# Altium PCB radioslave_v3.PcbDoc
Units mil, origin at the board's own origin, x right, y up, seen from the top; angles counter-clockwise.
Board outline 1771.65 x 4330 mil, 2 copper layers (Top Layer, Bottom Layer); 62 components, 46 nets, 203 pads, 34 vias.
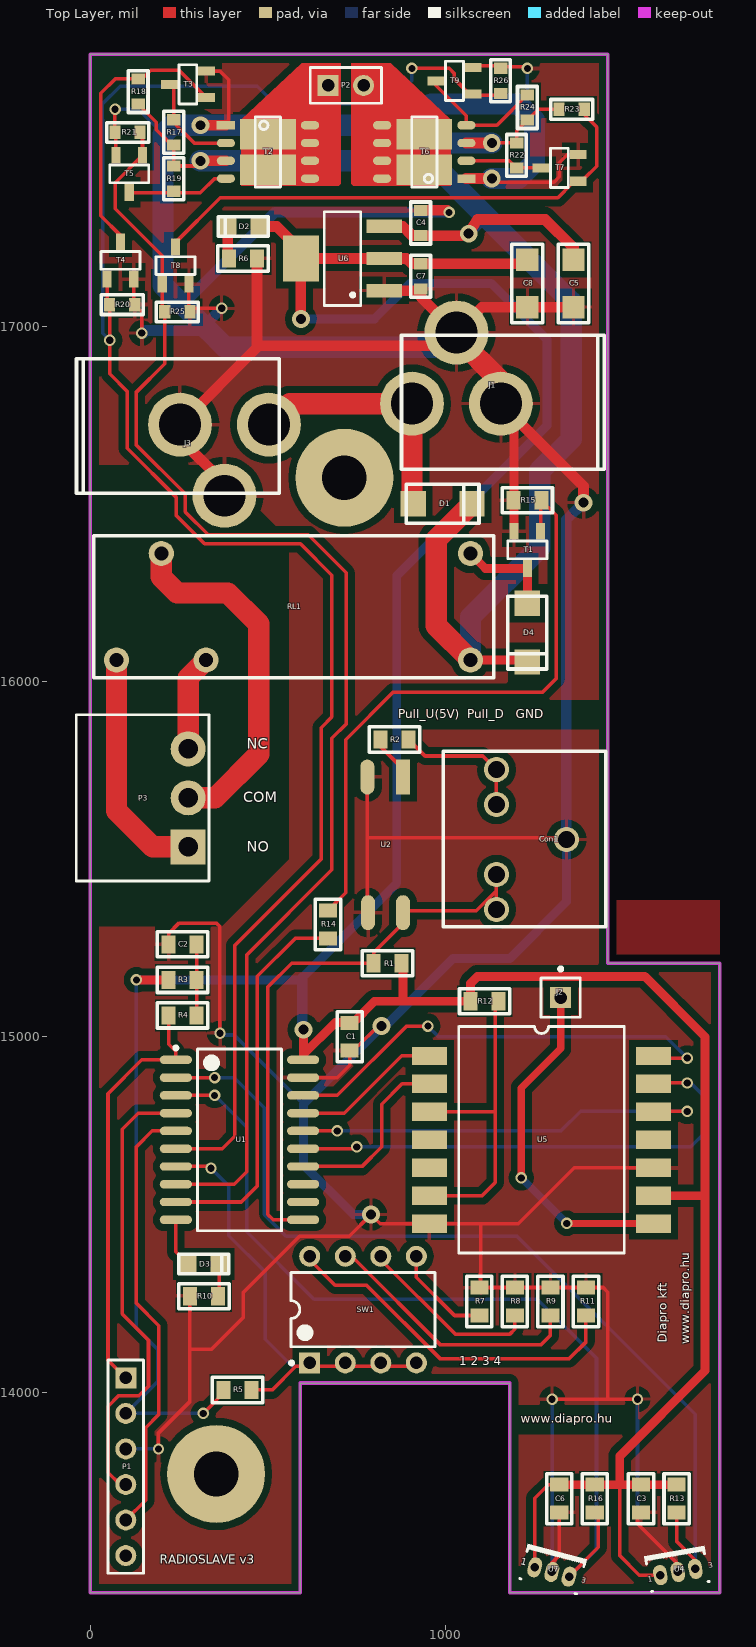
[diagram p0: Top Layer view]
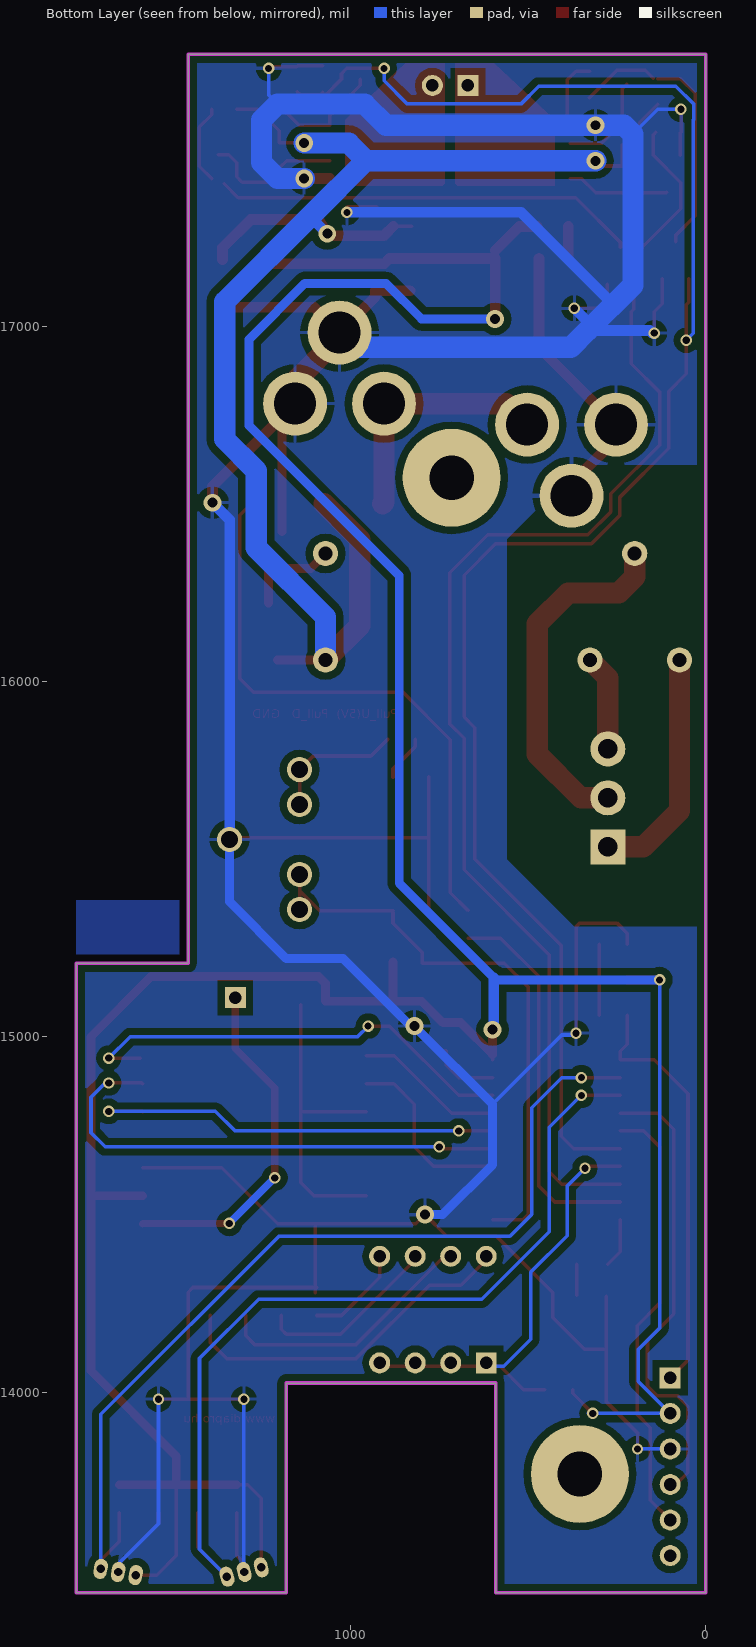
[diagram p1: Bottom Layer view, seen from below]
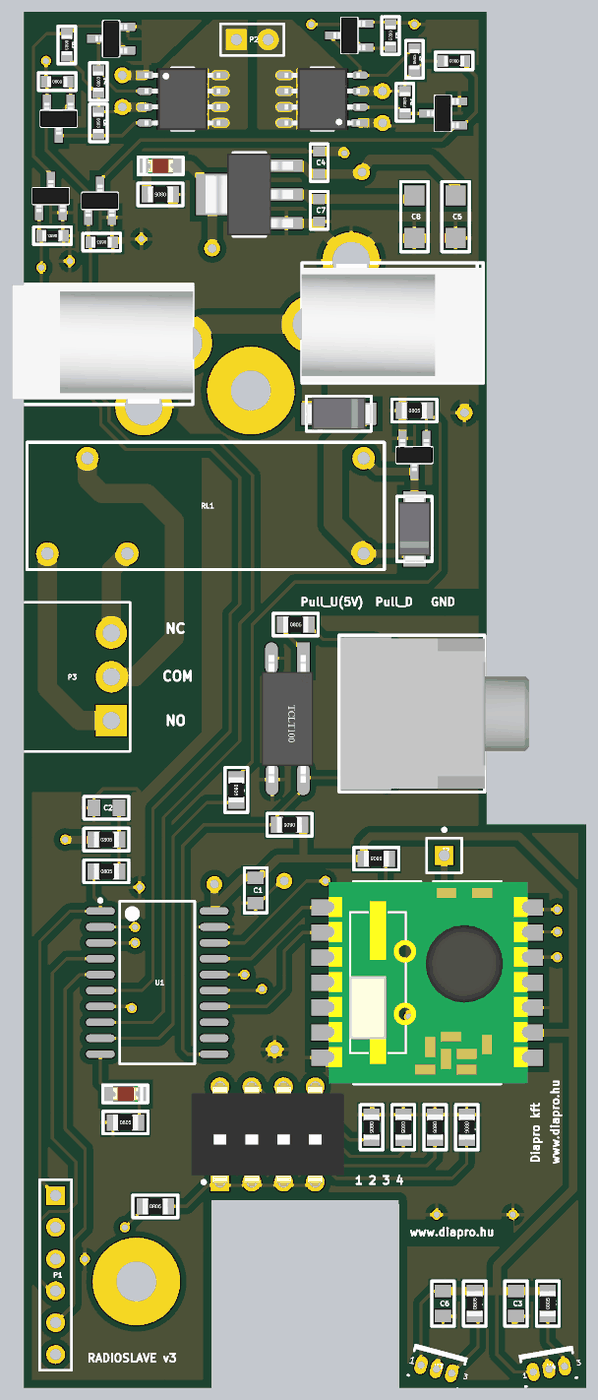
[diagram p2: 3D render of the assembled board from above, using the file's embedded part models]

## Layer stack, top to bottom
Top Layer: signal copper 1.4
Dielectric: dielectric 12.6, FR-4, Dk 4.8
Bottom Layer: signal copper 1.4

## Board outline
0,13435 0,17765 1456.69,17765 1456.69,15206.65 1771.65,15206.65 1771.65,13435 1181.1,13435 1181.1,14025.55 590.55,14025.55 590.55,13435

## Design rules (kind name [scope] priority, off if disabled: settings)
Clearance Clearance_to_polygon [All vs (InNamedPolygon('Bottom GND'))  or (InNamedPolygon('Top GND'))] p1: gap=20
Clearance [All] p2: gap=14
PolygonConnect [All] p1: connectstyle=Relief reliefconductorwidth=10 reliefentries=4 polygonreliefangle="90 Angle"
RoutingVias [All] p1: holewidth=20 width=32 viastyle="Through Hole" minholewidth=20 minwidth=32 maxholewidth=28 maxwidth=50
SilkToSilkClearance [All] p1: silktosilkclearance=0
SilkscreenOverComponentPads [All] p1: minsilkscreentomaskgap=0
SolderMaskExpansion [All] p1: expansion=4
Width [All] p1: maxlimit=60 minlimit=10 preferedwidth=10
26 further rules are at their usual default settings.

## Components (designator, comment, footprint, x,y, rotation, side; value= is the part's Value field where it differs from the comment)
C1 "100nF" FP_0805_CAP_060 730,15000 r90 top
C2 "100nF" FP_0805_CAP_060 260,15260 r0 top
C3 "100nF" FP_0805_CAP_060 1550,13700 r90 top
C4 "100nF" FP_0603_CAP_080 930,17290 r270 top
C5 "10uF" FP_1206_CAP_085 1360,17120 r270 top
C6 "100nF" FP_0805_CAP_060 1320,13700 r90 top
C7 "100nF" FP_0603_CAP_080 930,17140 r270 top
C8 "10uF" FP_1206_CAP_085 1230,17120 r90 top
Con1 "Stereo_Jack" STEREO_JACK 1340,15555 r180 top
D1 "DIODE_big" "FP_SMA DO214AC" 909,16500 r0 top
D2 "LED_RED" FP_0805_LED_RED 470,17280 r180 top
D3 "LED_GREEN" FP_0805_LED_RED 280,14360 r0 top
D4 "DIODE_big" "FP_SMA DO214AC" 1230,16220 r270 top
J1 "2.xmm" FP_DC_TAP_ANYA 905.51,16781.46 r270 top
J2 "ANT" PIN1 1324,15110 r0 top
J3 "2.xmm" FP_DC_TAP_ANYA 502.65,16722.44 r90 top
P1 "Header 6" HDR1X6 100,14040 r270 top
P2 "Header 2" HDR1X2 669.29,17677.17 r0 top
P3 "Header 3" "SORKAPOCS 3 P RM3.81" 275.47,15810 r270 top
R1 "10k" FP_0805_RES 836.61,15206.65 r180 top
R2 "470R" FP_0805_RES 856.3,15836.57 r0 top
R3 "10K" FP_0805_RES 260,15160 r0 top
R4 "100R" FP_0805_RES 260,15060 r0 top
R5 "10k" FP_0805_RES 414,14006 r0 top
R6 "270R" FP_0805_RES 430,17190 r180 top
R7 "10k" FP_0805_RES 1095,14255 r270 top
R8 "10k" FP_0805_RES 1195,14255 r270 top
R9 "10k" FP_0805_RES 1295,14255 r270 top
R10 "270R" FP_0805_RES 320,14270 r0 top
R11 "10k" FP_0805_RES 1395,14255 r270 top
R12 "10k" FP_0805_RES 1110,15100 r180 top
R13 "820R" FP_0805_RES 1650,13700 r90 top
R14 "470R" FP_0805_RES 669,15316 r270 top
R15 "10k" FP_0805_RES 1230,16510 r0 top
R16 "820R" FP_0805_RES 1420,13700 r90 top
R17 "1k" FP_0603_RES 235,17545 r90 top
R18 "10K" FP_0603_RES 135,17660 r270 top
R19 "10K" FP_0603_RES 235,17415 r270 top
R20 "10K" FP_0603_RES 90,17060 r180 top
R21 "10K" FP_0603_RES 105,17545 r0 top
R22 "1k" FP_0603_RES 1200,17480 r270 top
R23 "10K" FP_0603_RES 1355,17610 r180 top
R24 "10K" FP_0603_RES 1230,17615 r90 top
R25 "10K" FP_0603_RES 245,17040 r180 top
R26 "10K" FP_0603_RES 1155,17690 r270 top
RL1 "S7001E12W" RELAY_MORSE 1070,16360 r180 top
SW1 "DIPSW4" "DIP switch 4 TH" 767.72,14232.24 r90 top
T1 "Si2306" FET_SOT23 1230,16370 r90 top
T2 "SI4532ADY" FET_SOIC8_copper_pad 500,17490 r0 top
T3 "PMBF170" FET_SOT23 275,17680 r0 top
T4 "PMBF170" FET_SOT23 85,17185 r270 top
T5 "PMBF170" FET_SOT23 109.76,17428.36 r90 top
T6 "SI4532ADY" FET_SOIC8_copper_pad 940,17490 r180 top
T7 "PMBF170" FET_SOT23 1320,17445 r0 top
T8 "PMBF170" FET_SOT23 240,17170 r270 top
T9 "PMBF170" FET_SOT23 1025,17690 r0 top
U1 "PIC24F16KA101-I/SO" SOIC-SO20_N 420,14710 r0 top
U2 "KB817D-B" SOP-4L 830,15540 r270 top
U4 "A3122EUA" "Allegro_hall sensor" 1653.54,13493.74 r10 top
U5 "RFM12B" RFM12B-S1 1270,14710 r0 top
U6 "LD1117xx" SUPPLY_SOT223 710,17190 r180 top
U7 "A3122EUA" "Allegro_hall sensor" 1299.21,13493.74 r345 top

## Footprints (in the part's own frame and the unit in brackets; to place one, negate y for a bottom-side part, rotate by r counter-clockwise, add the part's x,y. Pads: shape width x height; smd on the part's side, far side on the other; paste and mask are expansions set on the pad)
"Allegro_hall sensor" [mm] "SIP; 3 Leads; Body 3 x 4 x 1.5 mm (typ); Pitch 1.27 mm"
  oval 0.95x1.45 hole 0.6: 1(-1.27,0) 2(0,0) 3(1.27,0)
  silkscreen extent -2.2,-1.05 2.2,1.53
"DIP switch 4 TH" [mm]
  rect 1.5x1.5 hole 0.9: 1(-3.81,3.81)
  round 1.5 hole 0.9: 2(-3.81,1.27) 3(-3.81,-1.27) 4(-3.81,-3.81) 5(3.81,-3.81) 6(3.81,-1.27) 7(3.81,1.27) 8(3.81,3.81)
  silkscreen extent -3.93,-5.15 2.65,5.23, body extent -4.1,-6.1 4.1,6.1, height 5
FET_SOIC8_copper_pad [mm]
  rect 4x2.2 smd: 0(0,-1.27) 0(0,1.27)
  rect 1.3x0.6 smd: 1(-3.008,1.905)
  oval 1.3x0.6 smd: 2(-3.008,0.635) 3(-3.008,-0.635) 4(-3.008,-1.905) 5(3.008,-1.905) 6(3.008,-0.635) 7(3.008,0.635) 8(3.008,1.905)
  silkscreen extent -0.9,-2.5 0.9,2.5, body extent -3.03,-2.5 3.03,2.5, height 1.9
FET_SOT23 [mm] "SOT23-3 tok"
  rect 1.2x0.65 smd: D(-1.327,0) G(1.327,-0.95) S(1.327,0.95)
  silkscreen extent -0.64,-1.4 0.64,1.4, body extent -1.27,-1.46 1.27,1.46, height 0.97
FP_0603_CAP_080 [mm] "0.8mm magas 0603 kapacitás"
  rect 0.8x0.95 smd: 1(-0.9,0) 2(0.9,0)
  silkscreen extent -1.5,-0.7 1.5,0.7, body extent -0.8,-0.4 0.76,0.4, height 0.8
FP_0603_RES [mm] "0603 ellenállás"
  rect 0.8x0.95 smd: 1(-0.9,0) 2(0.9,0)
  silkscreen extent -1.5,-0.7 1.5,0.7, body extent -0.8,-0.4 0.8,0.4, height 0.44
FP_0805_CAP_060 [mm] "0805 kapacitás YAGEO 0.6 mm magas"
  rect 1x1.3 smd: 1(-1,0) 2(1,0)
  silkscreen extent -1.8,-0.9 1.8,0.9, body extent -1,-0.64 1.03,0.64, height 0.6
FP_0805_LED_RED [mm] "0805 méretû piros LED"
  rect 1.2x1.3 smd: A(-0.1,0) K(2.1,0)
  silkscreen extent -0.8,-0.7 2.8,0.7, body extent 0.01,-0.63 2.03,0.62, height 1.1
FP_0805_RES [mm] "0805 ellenállás"
  rect 1x1.3 smd: 1(-1,0) 2(1,0)
  silkscreen extent -1.8,-0.9 1.8,0.9, body extent -1,-0.62 1,0.63, height 0.62
FP_1206_CAP_085 [mm] "1206 kapacitás 0.85 mm"
  rect 1.6x1.6 smd: 1(-1.7,0) 2(1.7,0)
  silkscreen extent -2.8,-1.1 2.8,1.1, body extent -1.52,-0.79 1.58,0.79, height 0.85
FP_DC_TAP_ANYA [mil] "DC HEBA25 TÁPFESZÜLTSÉG ALJZAT ZÁRT, NYÁKBA 90°"
  round 180 hole 118: 1(0,0) 2(0,250) 3(-200,125)
  silkscreen extent -193,-30 185,541, body extent -190,-31 183,539, height 440
"FP_SMA DO214AC" [mm] "SMA DO-214AC tok"
  rect 1.8x1.8 smd: A(0,0) K(4.2,0)
  silkscreen extent -0.5,-1.4 4.7,1.4, body extent -0.5,-1.3 4.7,1.3, height 2.42
HDR1X2 [mm] "Connector; Header; 2 Position"
  rect 1.5x1.5 hole 0.9: 1(0,0)
  round 1.5 hole 0.9: 2(2.54,0)
  silkscreen extent -1.27,-1.27 3.81,1.27
HDR1X6 [mm] "Connector; Header; 6 Position"
  rect 1.5x1.5 hole 0.9: 1(0,0)
  round 1.5 hole 0.9: 2(2.54,0) 3(5.08,0) 4(7.62,0) 5(10.16,0) 6(12.7,0)
  silkscreen extent -1.27,-1.27 13.97,1.27
PIN1 [mm] "Connector; Plug"
  rect 1.5x1.5 hole 0.9: 1(0,0)
  silkscreen extent -1.4,-1.4 1.4,2.17
RELAY_MORSE [mm]
  round 1.8 hole 1: 1(0,7.62) 2(0,0) 3(18.9,7.62) 4(22.1,0) 5(25.3,7.62)
  silkscreen extent -1.65,-1.27 26.92,8.89, body extent -1.65,-1.27 26.92,8.89, height 12.5
RFM12B-S1 [mm]
  rect 2.5x1.3 smd: 1(-8,6) 2(-8,4) 3(-8,2) 4(-8,0) 5(-8,-2) 6(-8,-4) 7(-8,-6) 8(8,-6) 9(8,-4) 10(8,-2) 11(8,0) 12(8,2) 13(8,4) 14(8,6)
  silkscreen extent -5.91,-8.1 5.92,8.1, body extent -7.88,-8.05 8.04,8.05, height 2.1
SOIC-SO20_N [mm] "SOIC, 20-Leads, Body 12.8x7.5mm, Pitch 1.27mm, IPC Medium Density"
  oval 2.3x0.6 smd: 1(-4.55,5.715) 2(-4.55,4.445) 3(-4.55,3.175) 4(-4.55,1.905) 5(-4.55,0.635) 6(-4.55,-0.635) 7(-4.55,-1.905) 8(-4.55,-3.175) 9(-4.55,-4.445) 10(-4.55,-5.715) 11(4.55,-5.715) 12(4.55,-4.445) 13(4.55,-3.175) 14(4.55,-1.905) 15(4.55,-0.635) 16(4.55,0.635) 17(4.55,1.905) 18(4.55,3.175) 19(4.55,4.445) 20(4.55,5.715)
  silkscreen extent -4.67,-6.5 3,6.69, body extent -3.75,-6.5 3.75,6.5, height 2.65
SOP-4L [mm]
  rect 2.5x1 smd: 1(-4.85,1.275)
  oval 2.5x1 smd: 2(-4.85,-1.275) 3(4.85,-1.225) 4(4.85,1.275)
  body extent -5.1,-2.05 5.1,2.05, height 2.1
"SORKAPOCS 3 P RM3.81" [mm] "SORKAPOCS 3 P RM3.81 CSAPSORLÉC TLPHC100V-03P (TLM) ZÁRT 8A 150V VDE [43-22-68]"
  rect 2.5x2.5 hole 1.4: 1(7,0)
  round 2.5 hole 1.4 mask+0.102: 2(3.5,0) 3(0,0)
  silkscreen extent -2.44,-8 9.45,1.5, body extent -2.41,-8 9.45,1.5, height 7.2
STEREO_JACK [mm] "JACK 3.5mm ANYA 90° JS35-09 (T-T) LEVÁL. NYÁK SZTEREO 90° A-V [43-08-39]"
  round 1.8 hole 1.2: 1(0,0) 2(5,5) 2(5,2.5) 3(5,-2.5) 3(5,-5)
  silkscreen extent -2.82,-6.3 8.81,6.22, body extent -6.33,-6.13 8.67,6.07, height 11.5
SUPPLY_SOT223 [mm] "SOT223 package, 3 leads"
  rect 2.55x0.95 smd: 1(-2.975,2.3) 2(-2.975,0) 3(-2.975,-2.3)
  rect 2.55x3.3 smd: 2(2.975,0)
  silkscreen extent -1.3,-3.35 1.3,3.35, body extent -3.5,-3.25 3.5,3.25, height 1.65

## Part data
C1 C2 C3 C4 C5 C6 C7 C8: library part Cap, "Capacitor"
D2: library part LED_R, "Typical LED"
D3: library part LED_G, "Typical LED"
J1 J3: library part DC_TAP_ANYA, "2.xmm DC HEBA25 TÁPFESZÜLTSÉG ALJZAT ZÁRT, NYÁKBA 90°"
J2: library part Socket, "Socket"
P1: "Header, 6-Pin"
P2: "Header, 2-Pin"
P3: "Header, 3-Pin"
R1 R2 R3 R4 R5 R6 R7 R8 R9 R10 R11 R12 R13 R14 R15 R16 R17 R22: library part Res3, "Resistor"
R18 R19 R20 R21 R23 R24 R25 R26: library part RES, "Resistor"
RL1: library part RELAY_MORSE, "S7001E12W  12V morse 230AC/10A"
T1 T3 T4 T5 T7 T8 T9: library part NMOS
T2 T6: library part "SI4532ADY   3.7A   30V"
U1: "16-Bit Flash Microcontroller with nanoWatt XLP Technology, 16KB Flash, 1.5KB SRAM, 20-Pin SOIC, Industrial Temperature"
U2: "KB817D-B (KIN) SOP-4L OPTOCOUPLER TRANS-OUT 300-600% 5kV SOP-4L [84-00-48]"
U4 U7: "Hall-Effect Switch for High-Temperature Operation"
U5: "FM Module"
U6: "LD1117xx 3,3V lin reg"

## Free pads (board coordinates)
  round 275.59 hole 125.98: 0(354.33,13769.65) 0(715,16573)

## Via types
v1: diameter 32, hole 20, Top Layer to Bottom Layer, 24 vias
v2: diameter 50, hole 28, Top Layer to Bottom Layer, 10 vias

## Nets (pads, with @x,y where several pads share a name; then routed paths per layer and width w, separated by ;. In a path a pad name is that pad's centre, name@x,y a point inside that pad or via, vN(x,y) a via of type N, cw(c..) or ccw(c..) an arc to the next point about the centre after c; other vN are vias at no path point)
AN0: R13.1 U1.2 U4.3 | length 2645.1
  Top Layer w10: U1.2 v1(350,14885) ; R13.1 1650,13580 1702.78,13527.22 U4.3
  Bottom Layer w10: v1(350,14885) 405,14885 490,14800 490,14500 551.06,14438.94 1201.06,14438.94 1702.78,13937.22 U4.3
AN1: R16.1 U1.3 U7.3 | length 2522.5
  Top Layer w10: U1.3 v1(350,14835) ; U7.3 1430,13563.29 R16.1@1430,13660.63
  Bottom Layer w10: v1(350,14835) 440,14745 440,14451.69 629.92,14261.77 1258.23,14261.77 1424.64,14095.36 1424.64,13557.94 U7.3
AN2: R5.2 SW1.1 SW1.2 SW1.3 SW1.4 U1.7 | length 1304.4
  Top Layer w10: U1.7 335,14635 v1(340,14630) ; R5.2 511.94,14006 578.35,14072.4 SW1.4@927.56,14072.4
  Bottom Layer w10: v1(340,14630) 390,14580 390,14440 492.13,14337.87 492.13,14148.78 568.5,14072.4 SW1.1@617.72,14072.4
AN2/PGD1: P1.4 U1.4 | length 1310.7
  Top Layer w10: P1.4 84,13740 50.47,13773.53 50.47,13960.51 79.49,13989.53 136.87,13989.53 164,14016.66 164,14146 90,14220 90,14740 135,14785 U1.4
GND: C1.1 C2.1 C3.1 C4.1 C5.2 C6.1 C7.2 C8.1 Con1.1 J1.2 J1.3 J3.2 J3.3 P1.3 R6.1 R7.1 R8.1 R9.1 R10.1 R11.1 R15.1 R20.1 R21.1 R25.1 R26.1 T1.S T2.1 T3.S T4.S T5.S T6.1 T7.S T8.S T9.S U1.19 U2.2 U2.3 U4.2 U5.7 U5.10 U6.1 U7.2 | length 17713.1
  Top Layer w10: v1(70,17610) 65,17605 65,17600 69.57,17595.43 R21.1 72.35,17542.21 T5.S ; T4.S 122.4,17063.03 R20.1 145,17040.43 v1(145,16980) ; v1(192,13840) 192,13885 280.63,13973.63 R10.1 ; C2.1 220.63,15290.63 250,15320 355,15320 365,15310 v1(365,15010) ; T8.S 277.4,17043.03 R25.1 290.43,17050 v1(370,17050) ; 284.61,14120 340.51,14120 430,14209.49 430,14280 588.94,14438.94 728.94,14438.94 v2(790,14500) 816.22,14473.78 U5.7 1204.78,14473.78 1362.26,14631.26 U5.10 ; T3.S 365,17717.4 389.67,17692.73 389.67,17580 381.57,17571.91 T2.1 ; U1.19 695,14885 730,14920 C1.1 740.63,14960.63 820,15040 v2@820,15050 ; U2.3@779.8,15349.06 779.8,15560.2 ; U2.2 779.8,15560.2 ; J1.3@994.06,16945 J1.3 J1.3@1030.51,16969.49 ; v1@1004.57,17325.43 v1(1010,17320) ; T9.S@1077.24,17732.4 1148.03,17732.4 1150.43,17730 1225,17730 v1(1230,17725) ; R7.1 R7.1@1099.37,14294.37 ; R7.1@1099.37,14280 R7.1@1099.37,14294.37 ; 1099.37,14473.15 R7.1@1099.37,14294.37 ; v2(1130,17415) 1140,17405 1305,17405 1320,17420 1320,17460 1342.4,17482.4 T7.S ; J1.2 J1.2@1161.98,16774.98 ; U7.2 1299.21,13519.21 1320,13540 C6.1 ; v1(1300,13980) 1456.69,13980 ; Con1.1 1334.8,15560.2 779.8,15560.2 ; C3.1@1540,13660.63 1540,13630 1653.54,13516.46 U4.2 ; v1(1540,13980) 1456.69,13980 ; R7.1@1099.37,14294.37 R8.1 R9.1 R11.1 1443.78,14294.37 1456.69,14281.46 1456.69,13980
  Top Layer w25: T1.S J1.2@1192.6,16744.37
  Top Layer w30: v2(310,17565) T2.1 ; J3.3 377.65,16557.35 252.65,16682.35 J3.2 470.11,16939.89 469.37,16940.63 ; R6.1 469.37,16945 J1.3@994.06,16945 ; U6.1@832.24,17099.57 930,17099.57 930,17081.97 J1.3 1102.13,17053.07 C5.2 ; C4.1 v1@1004.57,17325.43 ; T6.1 v2(1130,17415) ; J1.2@1161.98,16774.98 1192.6,16744.37 1388,16548.97 v2(1388,16503)
  Top Layer w60: J1.3@1030.51,16969.49 1155.51,16844.49 J1.2
  Bottom Layer w10: v1(70,17610) 135,17610 205,17540 ; P1.3 v1(192,13840) ; v1(365,15010) 365,15005 405,15005 600,14810 ; v2@810,15020 v2@820,15020 ; J1.2@1155.51,16705.51 J1.2 ; 1205,17625 1230,17650 v1(1230,17725) ; U7.2 1299.21,13519.21 1300,13520 v1(1300,13980) ; v1(1540,13980) 1540,13630 1653.54,13516.46 U4.2
  Bottom Layer w25: v2(790,14500) 740,14500 600,14640 600,14810 v2@810,15020 ; v2@820,15020 1020,15220 1180,15220 1340,15380 Con1.1
  Bottom Layer w30: v1(145,16980) 150,16980 157.5,16987.5 332.5,16987.5 332.5,17012.5 v1(370,17050) ; 275,17075 520,17320 v1(1010,17320) ; J1.3@989.06,16940 J1.3 ; Con1.1 1340,16455 v2(1388,16503)
  Bottom Layer w60: J1.3@989.06,16940 380,16940 332.5,16987.5 205,17115 205,17540 230,17565 v2(310,17565) 900,17565 960,17625 1205,17625 1250,17580 1250,17460 1205,17415 v2(1130,17415)
  other v2: 820,15030
GPIO0: Con1.2 R1.2 U1.11 U2.4 | length 1628.1
  Top Layer w10: U1.11 515,14485 500,14500 500,15140 566.65,15206.65 R1.2 797.24,15236.18 880.2,15319.13 U2.4 ; U2.4@880.2,15354.29 1086.29,15354.29 1143.15,15411.15 Con1.2@1143.15,15456.57 ; Con1.2@1143.15,15358.15 1143.15,15407.36
GPIO1: R14.2 U1.9 | length 1080.9
  Top Layer w10: U1.9 425,14535 470,14580 470,15170 576.63,15276.63 R14.2
GPIO2: D3.A U1.10 | length 139.6
  Top Layer w10: U1.10 240.87,14395.2 D3.A
GPIO3: R20.2 R26.2 T4.G T9.G U1.6 | length 5065.2
  Top Layer w10: T4.G 47.6,17066.97 R20.2 54.57,16865.43 104,16816 104,16656 242.65,16517.35 242.65,16466.52 321.73,16387.44 591.56,16387.44 680,16299 680,15900 650,15870 650,15500 406.86,15256.86 406.86,14720 371.86,14685 U1.6 ; v1(905,17725) 1009.84,17725 1025,17709.84 1025,17695 1067.4,17652.6 T9.G ; T9.G@1077.24,17657.6 1084.84,17650 1140.43,17650 R26.2@1150,17659.57
  Bottom Layer w10: v1(55,16960) 35,16980 35,17580 34,17581 34,17624.91 84.09,17675 470,17675 520,17625 840,17625 905,17690 v1(905,17725)
GPIO4/PGC1: P1.5 U1.5 | length 1244.1
  Top Layer w10: P1.5 156,13696 156,13900 193,13937 193,14187 130,14250 130,14690 175,14735 U1.5
GPIO5: R21.2 R25.2 T5.G T8.G U1.8 | length 3790.2
  Top Layer w10: R21.2 147.16,17538.28 T5.G 70,17403.44 70,17330 202.6,17197.4 T8.G 202.6,17046.97 R25.2 209.57,16893.57 129,16813 129,16666.36 267.65,16527.7 267.65,16476.88 332.09,16412.44 613.56,16412.44 720,16306 720,15880 680,15840 680,15470 440,15230 440,14620 405,14585 U1.8
IN: D1.A J1.1 J3.1 | length 710.2
  Top Layer w60: J3.1 561.67,16781.46 J1.1 905.51,16503.49 D1.A
M1: P2.1 T2.0 T2.5 T2.6 T2.7 T2.8 | length 283.2
  Top Layer w30: T2.5 T2.6 T2.7 T2.8 669.29,17615.87 P2.1
M2: P2.2 T6.0 T6.5 T6.6 T6.7 T6.8 | length 283.8
  Top Layer w30: P2.2 821.57,17624.88 T6.5 T6.6 T6.7 T6.8
M\C\L\R\: P1.1 R4.1 U1.1 | length 1184.3
  Top Layer w10: P1.1 50,14090 50,14840 145,14935 U1.1 240.87,14959.13 220.63,14979.37 R4.1
MISO: U1.17 U5.1 | length 422.7
  Top Layer w10: U1.17 715,14785 876.22,14946.22 U5.1
MOSI: U1.16 U5.12 | length 1199.2
  Top Layer w10: U1.16 v1(695,14735) ; U5.12 1586.22,14790 v1(1680,14790)
  Bottom Layer w10: v1(695,14735) 1325,14735 1380,14790 v1(1680,14790)
NetC2_2: C2.2 R3.2 R4.2 | length 200
  Top Layer w10: R4.2 R3.2 C2.2
NetCon1_3: Con1.3 R2.2 | length 381
  Top Layer w10: R2.2 942.24,15790 1105,15790 1143.15,15751.85 Con1.3@1143.15,15653.43
NetD2_K: D2.K R6.2 | length 86.7
  Top Layer w30: R6.2@387.32,17193.31 D2.K
NetD3_K: D3.K R10.2 | length 86.7
  Top Layer w10: R10.2@362.68,14273.31 D3.K
NetD4_A: D4.A RL1.2 T1.D | length 275.3
  Top Layer w25: RL1.2 1112.24,16317.76 T1.D D4.A
NetJ2_1: J2.1 U5.8 | length 978.5
  Top Layer w20: v1(1213,14603) 1213,14856 1324,14967 J2.1 ; v1(1341,14475) 1583.74,14475 U5.8
  Bottom Layer w20: v1(1213,14603) v1(1341,14475)
NetP3_1: P3.1 RL1.5 | length 670.5
  Top Layer w60: RL1.5@73.94,16062.95 73.94,15636.06 175.59,15534.41 P3.1
NetP3_2: P3.2 RL1.4 | length 1011.1
  Top Layer w60: RL1.4 199.92,16294.08 245,16249 387,16249 474,16162 474,15795 351.2,15672.2 P3.2
NetP3_3: P3.3 RL1.3 | length 270.9
  Top Layer w60: P3.3 275.47,16009.57 RL1.3
NetR2_1: R2.1 U2.1 | length 131.8
  Top Layer w10: R2.1 816.93,15816.89 880.2,15753.62 U2.1
NetR7_2: R7.2 SW1.5 | length 271
  Top Layer w10: SW1.5@917.72,14372.4 917.72,14323.19 1025.28,14215.63 R7.2
NetR8_2: R8.2 SW1.6 | length 508
  Top Layer w10: SW1.6@817.72,14372.4 1026.77,14163.35 1181.1,14163.35 1195,14177.24 R8.2
NetR9_2: R9.2 SW1.7 | length 743.1
  Top Layer w10: SW1.7@717.72,14372.4 745.67,14372.4 984.25,14133.82 1269.69,14133.82 1295,14159.13 R9.2
NetR11_2: R11.2 SW1.8 | length 986.3
  Top Layer w10: SW1.8@617.72,14372.4 688.98,14301.14 777.56,14301.14 984.25,14094.45 1348.43,14094.45 1395,14141.02 R11.2
NetR12_1: R12.1 U5.3 U5.6 | length 886.1
  Top Layer w10: U5.6 1102.52,14552.52 1140,14590 R12.1@1140,15090.63 ; U5.3 1140,14788.74
NetR14_1: R14.1 R15.2 T1.G | length 1769
  Top Layer w10: R14.1 719,15405.37 719,15836 853,15970 1273,15970 1311,16008 1311,16467.74 R15.2@1269.37,16509.37 ; T1.G R15.2@1267.4,16508.03
NetR17_2: R17.2 T2.2 T3.D | length 283.1
  Top Layer w10: T3.D 235,17667.76 R17.2 235,17572.3 292.3,17515 T2.2
NetR18_1: R18.1 T3.G T4.D | length 783.2
  Top Layer w10: T4.D 85,17255 30,17310 30,17655 70.43,17695.43 R18.1 ; R18.1@147.72,17697.72 170,17720 250,17720 250,17719.84 T3.G
NetR19_2: R19.2 T2.4 T5.D | length 288.8
  Top Layer w10: T5.D 110.87,17375 310,17375 350,17415 T2.4
NetR22_2: R22.2 T6.2 T7.D | length 218
  Top Layer w10: T6.2 1179.57,17465 R22.2 1200.43,17445 T7.D
NetR23_1: R23.1 T7.G T8.D | length 1419.9
  Top Layer w10: T8.D 240,17235 366.18,17361.18 1316.18,17361.18 T7.G@1355,17400 ; T7.G@1390,17415 1425,17450 1425,17560 1390.43,17594.57 R23.1
NetR24_2: R24.2 T6.4 T9.D | length 372.4
  Top Layer w10: T9.D@972.76,17695 T9.D 972.76,17677.24 1058.43,17591.57 T6.4 1144.57,17565 R24.2
"RF I\R\Q\": U1.14 U5.2 | length 522.5
  Top Layer w10: U1.14 765,14635 820,14690 820,14810 877.48,14867.48 U5.2
"RF S\S\": U1.18 U5.14 | length 1287.7
  Top Layer w10: U1.18 695,14835 890,15030 v1(950,15030) ; U5.14@1591.18,14940 v1(1680,14940)
  Bottom Layer w10: v1(950,15030) 980,15000 1620,15000 v1(1680,14940)
SCK: U1.15 U5.13 | length 1422.2
  Top Layer w10: U1.15 755,14685 v1(750,14690) ; U5.13 1587.48,14870 v1@1690,14870
  Bottom Layer w10: v1(750,14690) 1690,14690 1730,14730 1730,14830 v1@1690,14870
  other v1: 1680,14870
SCL: U1.12
SDA: U1.13
VCC3.3V: C1.2 C3.2 C6.2 C7.1 C8.2 D2.A P1.2 R1.1 R3.1 R5.1 R12.2 R13.2 R16.2 U1.20 U4.1 U5.9 U6.2 U7.1 | length 10145.1
  Top Layer w10: v1(318,13940) 374.63,13996.63 R5.1 ; U6.2@592.87,17190 U6.2@592.87,17212.13 ; U1.20 600,14935.87 600,14950 ; C8.2@1218.5,17175.43 C8.2 ; U7.1 1250.92,13700.92 1289.37,13739.37 C6.2 ; 1490,13739.37 1490,13540 1544.94,13485.06 U4.1 U4.1@1610,13479.36
  Top Layer w25: v1(130,15160) R3.1 ; v2(600,15020) 600,14950 690,15040 740,15040 800,15100 880,15100 ; R1.1@880,15210.63 880,15100 ; C6.2 R16.2 1490,13739.37 ; U5.9 1727.48,14552.52 ; R13.2 C3.2 1490,13739.37 ; 880,15100 R12.2 1070.63,15150.63 1090,15170 1560,15170 1730,15000 1730,14060 1490,13820 1490,13739.37
  Top Layer w30: D2.A 525,17280 U6.2@592.87,17212.13 ; v2(592.87,17020) 592.87,17190 827.13,17190 890,17190 904.57,17175.43 C7.1 C8.2@1218.5,17175.43
  Bottom Layer w10: v1(130,15160) 130,14180 190,14120 190,14030 P1.2 v1(318,13940) v1@330,13940 ; v2@590,17017.13 v2(592.87,17020) ; v2@596.5,15023.5 v2(600,15020)
  Bottom Layer w25: v1(130,15160) 590,15160 ; v2(592.87,17020) 800,17020 900,17120 1128,17120 1285,16963 1285,16720 862.5,16297.5 862.5,15432.5 596.5,15166.5
  Bottom Layer w30: v2@596.5,15023.5 596.5,15166.5
VCC_13V: C4.2 C5.1 D1.K D4.K R17.1 R18.2 R19.1 R22.1 R23.2 R24.1 RL1.1 T2.3 T6.3 U6.3 | length 4581.6
  Top Layer w10: R18.2 186.18,17573.39 186.18,17552.38 228.99,17509.57 R17.1 R19.1 295.43,17450.43 v2(310,17465) ; U6.3 879.45,17280.55 ; v2@1044.57,17254.57 v2(1065,17260) ; v2(1130,17515) 1130.43,17515.43 R22.1 1200,17549.57 R24.1 1260.43,17610 R23.2
  Top Layer w25: RL1.1 D4.K@1204.65,16060
  Top Layer w30: v2(310,17465) T2.3 ; 879.45,17280.55 905.43,17254.57 C4.2 v2@1044.57,17254.57 ; T6.3 v2(1130,17515) ; v2(1065,17260) 1090,17300 1280,17300 1360,17220 C5.1
  Top Layer w60: RL1.1 973.5,16156.5 973.5,16399.15 D1.K
  Bottom Layer w30: v2(1065,17260) 1108.5,17303.5 1108.5,17313.5
  Bottom Layer w60: v2(310,17465) 956,17465 ; RL1.1 1070,16181 1265,16376 1265,16593 1354,16682 1354,17068 1108.5,17313.5 956,17466 1005,17515 v2(1130,17515)
pads on no net: P1.6 U5.4 U5.5 U5.11

## Polygon pours and split planes (outlines as drawn)
GND on Top Layer "Top GND" (solid, pour order 4): 1456.69,17765 1456.69,15383.5 1771.65,15383.5 1771.65,13435 1181.1,13435 1181.1,13907.92 590.55,13907.92 590.55,13435 0,13435 0,17765
GND on Bottom Layer "Bottom GND" (solid, pour order 5): 1456.69,17765 1456.69,15383.5 1771.65,15383.5 1771.65,13435 1181.1,13435 1181.1,13907.92 590.55,13907.92 590.55,13435 0,13435 0,17765

## Keep-outs
Keep-Out Layer:
  lines w10: 0,13435 0,17765 712.24,17765 1456.69,17765 1456.69,15324.76 1456.69,15206.65 1542.72,15206.65 1771.65,15206.65 1771.65,13435 1181.1,13435 1181.1,14025.55 590.55,14025.55 590.55,13435 0,13435

## Other copper
Top Layer:
  pour cut-out: 605.31,14025.55 1166.34,14025.55 1166.34,13946.81 1171.26,13848.39 1083.87,13837.14 610.09,13853.48
  pour cut-out: 0,16610 350,16610 560,16400 560,15500 370,15310 0,15310
  region net M2: 1015,17580 845,17740 735,17740 735,17400 740,17395 1015,17395
  region net M1: 425,17580 595,17740 705,17740 705,17400 700,17395 425,17395
  text "Pull_U(5V)  Pull_D   GND" at 866.14,15895.63 h25
  text "www.diapro.hu" at 1211.42,13913.62 h25
Bottom Layer:
  pour cut-out: 600.39,14025.55 610.24,13848.39 1151.57,13848.39 1161.42,13838.54 1171.26,13848.39 1181.1,14025.55
  pour cut-out: 0,16610 350,16610 560,16400 560,15500 370,15310 0,15310

## Silkscreen, mask and mechanical layers (free items; w line width, h text height)
Top Overlay:
  text "Pull_U(5V)  Pull_D   GND" at 866.14,15895.63 h25
  text "NC" at 440,15810 h30
  text "COM" at 430,15660 h30
  text "NO" at 440,15520 h30
  text "Diapro kft" at 1623,14139 h25 r90
  text "www.diapro.hu" at 1685,14135 h25 r90
  text "1 2 3 4" at 1038,14076 h25
  text "www.diapro.hu" at 1211.42,13913.62 h25
  text "RADIOSLAVE v3" at 196,13517 h25
Mechanical 15:
  lines w7.87: 0,17372.01 1456.69,17372.01 1456.69,17765.71 0,17765.71 0,17372.01

## Text inside footprints (layer, text, board x,y; h text height)
U4: Top Overlay "3" at 1740,13505 h15 r10; Top Overlay "1" at 1570,13465 h15 r10
U7: Top Overlay "3" at 1380,13465 h15 r345; Top Overlay "1" at 1210,13515 h20 r345